# EAGLE board untitled (EAGLE 5.07)
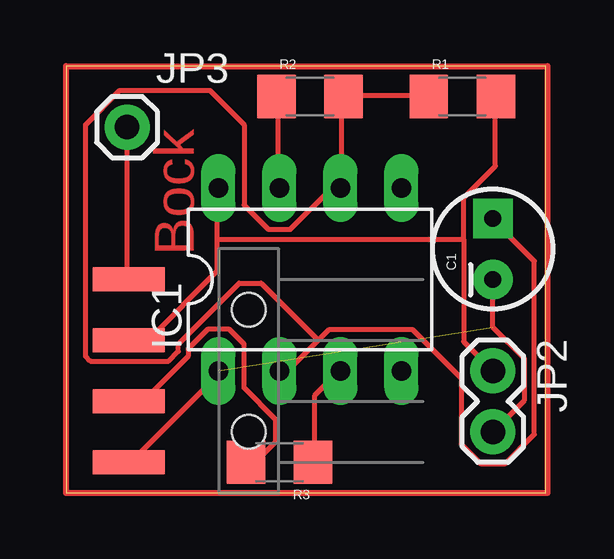
[diagram p0: board, top side]

Size 19.99 x 17.77 mm. Coordinates in mm from the lower left corner, seen from the top.
Outline: 0,0 19.99,0 19.99,17.77 0,17.77 0,0
Copper layers (1*16): Top 0.035mm / dielectric 1.5mm / Bottom 0.035mm
Design rules "DesignRules": minimum track width 8mil, minimum drill 20mil, track to track 8mil, track to pad 8mil, pad to pad 8mil, via to via 8mil, smd to smd 8mil, copper to edge 10mil, drill to drill 8mil, minimum pad ring 12mil, minimum via ring 10mil, stop-mask expansion 4mil, vias tented up to drill 25mil, thermal gap 10mil

## Footprints (pad centres in the part's own frame; a part is rotated, then mirrored left to right if it is on the bottom)
CPOL-RADIAL-10UF-25V = drill 0.7 pad 1.651 square: 1 1.27,0 | drill 0.7 pad 1.651 round: 2 -1.27,0
DIL-08 = drill 0.813 long: 1 -3.81,-3.81; 2 -1.27,-3.81; 3 1.27,-3.81; 4 3.81,-3.81; 5 3.81,3.81; 6 1.27,3.81; 7 -1.27,3.81; 8 -3.81,3.81
1X04-SMD = smd 1 x 3: 1 -3.81,5; 2 -1.27,5; 3 1.27,5; 4 3.81,5 | hole 1.4: -2.54,0; 2.54,0
1X02 = drill 1.016 pad 1.88 round: 1 0,0; 2 2.54,0
1X01 = drill 1.016 pad 1.88 round: 1 0,0
1206 = smd 1.6 x 1.8: 1 -1.4,0; 2 1.4,0

## Placement (x,y rotation side)
C1  [CPOL-RADIAL-10UF-25V]  17.78,10.16 90 top
IC1  NE555  [DIL-08]  10.16,8.89 0 top
JP1  [1X04-SMD]  7.62,5.08 90 top
JP2  [1X02]  17.78,5.08 270 top
JP3  M01PTH  [1X01]  2.54,15.24 0 top
R1  [1206]  16.51,16.51 0 top
R2  [1206]  10.16,16.51 0 top
R3  [1206]  8.89,1.27 180 top

## Library data of the parts
C1 JP1-JP3 R1-R3 = SparkFun
IC1 = st-microelectronics

## Nets
ANT: JP1.4 JP3.1
DAT: JP1.2 R3.2
GND: C1.2 IC1.1 JP1.1 JP2.2
N$1: IC1.3 R3.1
N$12: IC1.7 R2.1
N$13: C1.1 IC1.2 IC1.6 R1.1 R2.2
VCC: IC1.8 JP1.3 JP2.1 R1.2

## Tracks (layer width: path | path; a pad name or v marks a point on that pad's centre or on a via)
ANT
  Top 0.203: JP3.1 2.54,8.94 JP1.4
DAT
  Top 0.203: R3.2 7.52,1.32 7.92,1.32 8.74,2.13 8.74,3.05 7.42,4.37 7.42,6.2 6.81,6.81 5.89,6.81 5.08,5.99 5.08,5.69 3.25,3.86 2.64,3.86 JP1.2
GND  (1 unrouted)
  Top 0.203: JP2.2 19.1,3.86 19.1,5.59 17.78,6.91 C1.2 | IC1.1 6.3,5.08 6.3,4.88 2.64,1.22 JP1.1
N$1
  Top 0.203: R3.1 10.36,1.32 10.36,4.06 11.38,5.08 IC1.3
N$2
  Top 0.254: 0,17.78 20.07,17.78 20.07,0 0,0 0,17.78
N$12
  Top 0.203: R2.1 8.84,16.46 8.84,12.7 IC1.7
N$13
  Top 0.203: R1.1 15.04,16.56 11.58,16.56 R2.2 11.48,16.46 11.48,12.7 IC1.6 11.07,12.7 9.35,10.97 8.43,10.97 7.42,11.99 7.42,15.34 5.99,16.76 2.23,16.76 0.81,15.34 0.81,5.69 1.02,5.49 4.27,5.49 4.67,5.89 4.67,6.2 7.21,8.74 8.13,8.74 10.52,6.35 | 10.52,6.35 10.97,6.81 14.43,6.81 16.46,4.78 16.46,2.03 17.27,1.22 18.29,1.22 19.51,2.44 19.51,9.65 17.78,11.38 C1.1 | 10.52,6.35 9.25,5.08 IC1.2
VCC
  Top 0.203: 6.3,10.57 6.3,9.25 3.45,6.4 2.64,6.4 JP1.3 | 6.3,10.57 6.3,12.7 IC1.8 | 16.56,10.57 16.56,6.3 JP2.1 | 16.56,10.57 16.56,12.29 17.88,13.61 17.88,16.46 R1.2 | 6.3,10.57 16.56,10.57

## Text on the board
Top: Bock